# Altium PCB hall_strip.PcbDoc (part 1 of 2)
Units mm, origin at the board's own origin, x right, y up, seen from the top; angles counter-clockwise.
Board outline 200 x 15 mm, 2 copper layers (Top Layer, Bottom Layer); 100 components, 6 nets, 261 pads, 183 vias.
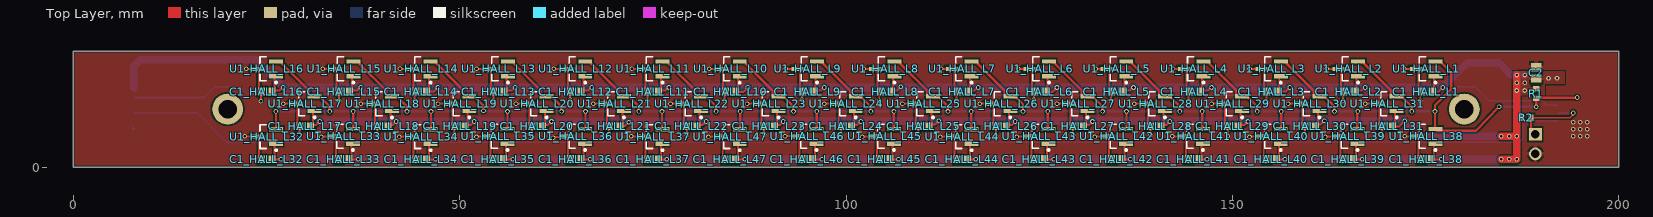
[diagram p0: Top Layer view]
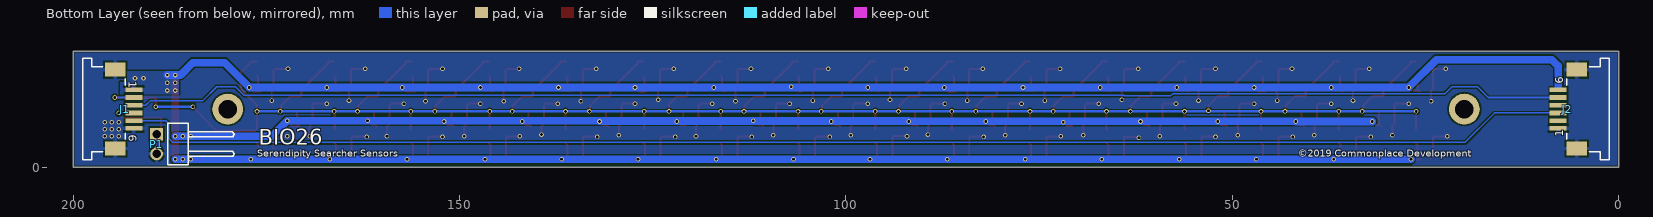
[diagram p1: Bottom Layer view, seen from below]
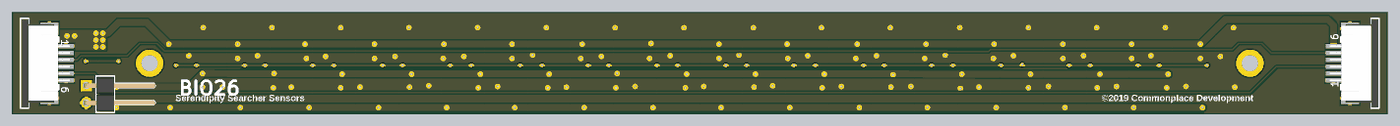
[diagram p3: 3D render of the assembled board from below, using the file's embedded part models]

## Layer stack, top to bottom
Top Solder: solder mask 0.0102, Solder Resist, Dk 3.5
Top Layer: signal copper 0.0356
Dielectric 1: dielectric 0.32, FR-4, Dk 4.8
Bottom Layer: signal copper 0.0356
Bottom Solder: solder mask 0.0102, Solder Resist, Dk 3.5

## Board outline
200,0 200,15 0,15 0,0

## Design rules (kind name [scope] priority, off if disabled: settings)
BoardOutlineClearance [All] p1: gap=0.2 ignorepadtopadclearanceinfootprint=FALSE except(0.4: Arc-SplitBarrior Arc-SplitContinuation Track-SplitBarrior Track-SplitContinuation SMDPad-SplitBarrior SMDPad-SplitContinuation THPad-SplitBarrior THPad-SplitContinuation Via-SplitBarrior Via-SplitContinuation Fill-SplitBarrior Fill-SplitContinuation Poly-SplitBarrior Poly-SplitContinuation Region-SplitBarrior Region-SplitContinuation Text-SplitBarrior Text-SplitContinuation)
Clearance "Clearance Bottom Layer" [OnLayer('Bottom Layer')] p1: gap=0.203 ignorepadtopadclearanceinfootprint=TRUE except(0.254: Arc-Text Track-Text SMDPad-Text THPad-Text Via-Text Fill-Text Poly-Text Region-Text Text-Text)
Clearance "Clearance Top Layer" [OnLayer('Top Layer')] p2: gap=0.203 ignorepadtopadclearanceinfootprint=TRUE except(0.254: Arc-Text Track-Text SMDPad-Text THPad-Text Via-Text Fill-Text Poly-Text Region-Text Text-Text)
Clearance [All] p3: gap=0.2 ignorepadtopadclearanceinfootprint=FALSE except(0.089: Arc-Arc Arc-Track Arc-SMDPad Track-Track Track-SMDPad SMDPad-SMDPad; 0.127: Arc-Via Track-Via SMDPad-Via THPad-Via Via-Via; 0.254: Arc-Text Track-Text SMDPad-Text THPad-Text Via-Text Fill-Text Poly-Text Region-Text Text-Text)
HoleSize [All] p1: absolutevalues=TRUE maxlimit=6.3 minlimit=0.2 maxpercent=80.000 minpercent=20.000
MinimumAnnularRing [All] p1: minimumring=0.076
MinimumSolderMaskSliver [All] p1: minsoldermaskwidth=0.1
PolygonConnect PolygonConnect_1 [All] p1: thpad.connectstyle=Relief thpad.reliefconductorwidth=0.508 thpad.reliefentries=4 thpad.polygonreliefangle="90 Angle" thpad.airgapwidth=0.254 smdpad.connectstyle=Relief smdpad.reliefconductorwidth=0.508 smdpad.reliefentries=4 smdpad.polygonreliefangle="90 Angle" smdpad.airgapwidth=0.254 via.connectstyle=Direct via.reliefconductorwidth=0.508 via.reliefentries=4 via.polygonreliefangle="90 Angle" via.airgapwidth=0.254
PolygonConnect [All] p2: connectstyle=Relief reliefconductorwidth=0.254 reliefentries=4 polygonreliefangle="90 Angle" airgapwidth=0.254
RoomDefinition HALL_L47 [InComponentClass('HALL_L47')] p1: confinementstyle=ConfineIn formatcopy=TRUE lockcomponents=FALSE outline 86.689,0 83.431,0 83.431,1.621 82.181,1.621 82.181,6.279 87.939,6.279 87.939,1.621 86.689,1.621
RoomDefinition HALL_L46 [InComponentClass('HALL_L46')] p2: confinementstyle=ConfineIn formatcopy=TRUE lockcomponents=FALSE outline 96.633,0.029 93.375,0.029 93.375,1.65 92.125,1.65 92.125,6.308 97.883,6.308 97.883,1.65 96.633,1.65
RoomDefinition HALL_L45 [InComponentClass('HALL_L45')] p3: confinementstyle=ConfineIn formatcopy=TRUE lockcomponents=FALSE outline 106.633,0.029 103.375,0.029 103.375,1.65 102.125,1.65 102.125,6.308 107.883,6.308 107.883,1.65 106.633,1.65
RoomDefinition HALL_L44 [InComponentClass('HALL_L44')] p4: confinementstyle=ConfineIn formatcopy=TRUE lockcomponents=FALSE outline 116.689,0 113.431,0 113.431,1.621 112.181,1.621 112.181,6.279 117.939,6.279 117.939,1.621 116.689,1.621
RoomDefinition HALL_L43 [InComponentClass('HALL_L43')] p5: confinementstyle=ConfineIn formatcopy=TRUE lockcomponents=FALSE outline 126.633,0.029 123.375,0.029 123.375,1.65 122.125,1.65 122.125,6.308 127.883,6.308 127.883,1.65 126.633,1.65
RoomDefinition HALL_L42 [InComponentClass('HALL_L42')] p6: confinementstyle=ConfineIn formatcopy=TRUE lockcomponents=FALSE outline 136.689,0.029 133.431,0.029 133.431,1.65 132.181,1.65 132.181,6.308 137.939,6.308 137.939,1.65 136.689,1.65
RoomDefinition HALL_L41 [InComponentClass('HALL_L41')] p7: confinementstyle=ConfineIn formatcopy=TRUE lockcomponents=FALSE outline 146.608,0.029 143.35,0.029 143.35,1.65 142.1,1.65 142.1,6.308 147.858,6.308 147.858,1.65 146.608,1.65
RoomDefinition HALL_L40 [InComponentClass('HALL_L40')] p8: confinementstyle=ConfineIn formatcopy=TRUE lockcomponents=FALSE outline 156.689,0.029 153.431,0.029 153.431,1.65 152.181,1.65 152.181,6.308 157.939,6.308 157.939,1.65 156.689,1.65
RoomDefinition HALL_L39 [InComponentClass('HALL_L39')] p9: confinementstyle=ConfineIn formatcopy=TRUE lockcomponents=FALSE outline 166.608,0.029 163.35,0.029 163.35,1.65 162.1,1.65 162.1,6.308 167.858,6.308 167.858,1.65 166.608,1.65
RoomDefinition HALL_L38 [InComponentClass('HALL_L38')] p10: confinementstyle=ConfineIn formatcopy=TRUE lockcomponents=FALSE outline 176.689,0.029 173.431,0.029 173.431,1.65 172.181,1.65 172.181,6.308 177.939,6.308 177.939,1.65 176.689,1.65
RoomDefinition HALL_L37 [InComponentClass('HALL_L37')] p11: confinementstyle=ConfineIn formatcopy=TRUE lockcomponents=FALSE outline 76.689,0 73.431,0 73.431,1.621 72.181,1.621 72.181,6.279 77.939,6.279 77.939,1.621 76.689,1.621
RoomDefinition HALL_L36 [InComponentClass('HALL_L36')] p12: confinementstyle=ConfineIn formatcopy=TRUE lockcomponents=FALSE outline 66.689,0.029 63.431,0.029 63.431,1.65 62.181,1.65 62.181,6.308 67.939,6.308 67.939,1.65 66.689,1.65
RoomDefinition HALL_L35 [InComponentClass('HALL_L35')] p13: confinementstyle=ConfineIn formatcopy=TRUE lockcomponents=FALSE outline 56.633,0.029 53.375,0.029 53.375,1.65 52.125,1.65 52.125,6.308 57.883,6.308 57.883,1.65 56.633,1.65
RoomDefinition HALL_L34 [InComponentClass('HALL_L34')] p14: confinementstyle=ConfineIn formatcopy=TRUE lockcomponents=FALSE outline 46.689,0 43.431,0 43.431,1.621 42.181,1.621 42.181,6.279 47.939,6.279 47.939,1.621 46.689,1.621
RoomDefinition HALL_L33 [InComponentClass('HALL_L33')] p15: confinementstyle=ConfineIn formatcopy=TRUE lockcomponents=FALSE outline 36.633,0.029 33.375,0.029 33.375,1.65 32.125,1.65 32.125,6.308 37.883,6.308 37.883,1.65 36.633,1.65
RoomDefinition HALL_L32 [InComponentClass('HALL_L32')] p16: confinementstyle=ConfineIn formatcopy=TRUE lockcomponents=FALSE outline 26.697,0 23.439,0 23.439,1.621 22.189,1.621 22.189,6.279 27.947,6.279 27.947,1.621 26.697,1.621
RoomDefinition HALL_L31 [InComponentClass('HALL_L31')] p17: confinementstyle=ConfineIn formatcopy=TRUE lockcomponents=FALSE outline 171.689,4.25 168.431,4.25 168.431,5.871 167.181,5.871 167.181,10.529 172.939,10.529 172.939,5.871 171.689,5.871
RoomDefinition HALL_L30 [InComponentClass('HALL_L30')] p18: confinementstyle=ConfineIn formatcopy=TRUE lockcomponents=FALSE outline 161.689,4.25 158.431,4.25 158.431,5.871 157.181,5.871 157.181,10.529 162.939,10.529 162.939,5.871 161.689,5.871
RoomDefinition HALL_L29 [InComponentClass('HALL_L29')] p19: confinementstyle=ConfineIn formatcopy=TRUE lockcomponents=FALSE outline 151.697,4.25 148.439,4.25 148.439,5.871 147.189,5.871 147.189,10.529 152.947,10.529 152.947,5.871 151.697,5.871
RoomDefinition HALL_L28 [InComponentClass('HALL_L28')] p20: confinementstyle=ConfineIn formatcopy=TRUE lockcomponents=FALSE outline 141.697,4.25 138.439,4.25 138.439,5.871 137.189,5.871 137.189,10.529 142.947,10.529 142.947,5.871 141.697,5.871
RoomDefinition HALL_L27 [InComponentClass('HALL_L27')] p21: confinementstyle=ConfineIn formatcopy=TRUE lockcomponents=FALSE outline 131.697,4.25 128.439,4.25 128.439,5.871 127.189,5.871 127.189,10.529 132.947,10.529 132.947,5.871 131.697,5.871
RoomDefinition HALL_L26 [InComponentClass('HALL_L26')] p22: confinementstyle=ConfineIn formatcopy=TRUE lockcomponents=FALSE outline 121.697,4.25 118.439,4.25 118.439,5.871 117.189,5.871 117.189,10.529 122.947,10.529 122.947,5.871 121.697,5.871
RoomDefinition HALL_L25 [InComponentClass('HALL_L25')] p23: confinementstyle=ConfineIn formatcopy=TRUE lockcomponents=FALSE outline 111.697,4.25 108.439,4.25 108.439,5.871 107.189,5.871 107.189,10.529 112.947,10.529 112.947,5.871 111.697,5.871
RoomDefinition HALL_L24 [InComponentClass('HALL_L24')] p24: confinementstyle=ConfineIn formatcopy=TRUE lockcomponents=FALSE outline 101.697,4.25 98.439,4.25 98.439,5.871 97.189,5.871 97.189,10.529 102.947,10.529 102.947,5.871 101.697,5.871
RoomDefinition HALL_L23 [InComponentClass('HALL_L23')] p25: confinementstyle=ConfineIn formatcopy=TRUE lockcomponents=FALSE outline 91.697,4.25 88.439,4.25 88.439,5.871 87.189,5.871 87.189,10.529 92.947,10.529 92.947,5.871 91.697,5.871
RoomDefinition HALL_L22 [InComponentClass('HALL_L22')] p26: confinementstyle=ConfineIn formatcopy=TRUE lockcomponents=FALSE outline 81.697,4.25 78.439,4.25 78.439,5.871 77.189,5.871 77.189,10.529 82.947,10.529 82.947,5.871 81.697,5.871
RoomDefinition HALL_L21 [InComponentClass('HALL_L21')] p27: confinementstyle=ConfineIn formatcopy=TRUE lockcomponents=FALSE outline 71.697,4.25 68.439,4.25 68.439,5.871 67.189,5.871 67.189,10.529 72.947,10.529 72.947,5.871 71.697,5.871
RoomDefinition HALL_L20 [InComponentClass('HALL_L20')] p28: confinementstyle=ConfineIn formatcopy=TRUE lockcomponents=FALSE outline 61.697,4.25 58.439,4.25 58.439,5.871 57.189,5.871 57.189,10.529 62.947,10.529 62.947,5.871 61.697,5.871
RoomDefinition HALL_L19 [InComponentClass('HALL_L19')] p29: confinementstyle=ConfineIn formatcopy=TRUE lockcomponents=FALSE outline 51.697,4.25 48.439,4.25 48.439,5.871 47.189,5.871 47.189,10.529 52.947,10.529 52.947,5.871 51.697,5.871
RoomDefinition HALL_L18 [InComponentClass('HALL_L18')] p30: confinementstyle=ConfineIn formatcopy=TRUE lockcomponents=FALSE outline 41.697,4.25 38.439,4.25 38.439,5.871 37.189,5.871 37.189,10.529 42.947,10.529 42.947,5.871 41.697,5.871
RoomDefinition HALL_L17 [InComponentClass('HALL_L17')] p31: confinementstyle=ConfineIn formatcopy=TRUE lockcomponents=FALSE outline 31.689,4.25 28.431,4.25 28.431,5.871 27.181,5.871 27.181,10.529 32.939,10.529 32.939,5.871 31.689,5.871
RoomDefinition U_input [InComponentClass('U_input')] p32: confinementstyle=ConfineIn formatcopy=TRUE lockcomponents=FALSE outline 0.746,0.446 0.746,14.554 9.429,14.554 9.429,0.446
RoomDefinition U_gpio [InComponentClass('U_gpio')] p33: confinementstyle=ConfineIn formatcopy=TRUE lockcomponents=FALSE outline 178.681,-0.199 178.681,6.139 186.621,6.139 186.621,7.279 189.379,7.279 189.379,6.139 190.504,6.139 190.504,-0.199
RoomDefinition U_output [InComponentClass('U_output')] p34: confinementstyle=ConfineIn formatcopy=TRUE lockcomponents=FALSE outline 188.171,10.571 188.171,13.829 190.571,13.829 190.571,14.554 199.254,14.554 199.254,0.446 190.571,0.446 190.571,8.121 188.421,8.121 188.421,10.571
RoomDefinition HALL_L16 [InComponentClass('HALL_L16')] p35: confinementstyle=ConfineIn formatcopy=TRUE lockcomponents=FALSE outline 26.697,8.75 23.439,8.75 23.439,10.371 22.189,10.371 22.189,15.029 27.947,15.029 27.947,10.371 26.697,10.371
RoomDefinition HALL_L15 [InComponentClass('HALL_L15')] p36: confinementstyle=ConfineIn formatcopy=TRUE lockcomponents=FALSE outline 36.697,8.75 33.439,8.75 33.439,10.371 32.189,10.371 32.189,15.029 37.947,15.029 37.947,10.371 36.697,10.371
RoomDefinition HALL_L14 [InComponentClass('HALL_L14')] p37: confinementstyle=ConfineIn formatcopy=TRUE lockcomponents=FALSE outline 46.697,8.75 43.439,8.75 43.439,10.371 42.189,10.371 42.189,15.029 47.947,15.029 47.947,10.371 46.697,10.371
RoomDefinition HALL_L13 [InComponentClass('HALL_L13')] p38: confinementstyle=ConfineIn formatcopy=TRUE lockcomponents=FALSE outline 56.697,8.75 53.439,8.75 53.439,10.371 52.189,10.371 52.189,15.029 57.947,15.029 57.947,10.371 56.697,10.371
RoomDefinition HALL_L12 [InComponentClass('HALL_L12')] p39: confinementstyle=ConfineIn formatcopy=TRUE lockcomponents=FALSE outline 66.697,8.75 63.439,8.75 63.439,10.371 62.189,10.371 62.189,15.029 67.947,15.029 67.947,10.371 66.697,10.371
RoomDefinition HALL_L11 [InComponentClass('HALL_L11')] p40: confinementstyle=ConfineIn formatcopy=TRUE lockcomponents=FALSE outline 76.697,8.75 73.439,8.75 73.439,10.371 72.189,10.371 72.189,15.029 77.947,15.029 77.947,10.371 76.697,10.371
RoomDefinition HALL_L10 [InComponentClass('HALL_L10')] p41: confinementstyle=ConfineIn formatcopy=TRUE lockcomponents=FALSE outline 86.697,8.75 83.439,8.75 83.439,10.371 82.189,10.371 82.189,15.029 87.947,15.029 87.947,10.371 86.697,10.371
RoomDefinition HALL_L9 [InComponentClass('HALL_L9')] p42: confinementstyle=ConfineIn formatcopy=TRUE lockcomponents=FALSE outline 96.697,8.75 93.439,8.75 93.439,10.371 92.189,10.371 92.189,15.029 97.947,15.029 97.947,10.371 96.697,10.371
RoomDefinition HALL_L8 [InComponentClass('HALL_L8')] p43: confinementstyle=ConfineIn formatcopy=TRUE lockcomponents=FALSE outline 106.697,8.75 103.439,8.75 103.439,10.371 102.189,10.371 102.189,15.029 107.947,15.029 107.947,10.371 106.697,10.371
RoomDefinition HALL_L7 [InComponentClass('HALL_L7')] p44: confinementstyle=ConfineIn formatcopy=TRUE lockcomponents=FALSE outline 116.697,8.75 113.439,8.75 113.439,10.371 112.189,10.371 112.189,15.029 117.947,15.029 117.947,10.371 116.697,10.371
RoomDefinition HALL_L6 [InComponentClass('HALL_L6')] p45: confinementstyle=ConfineIn formatcopy=TRUE lockcomponents=FALSE outline 126.697,8.75 123.439,8.75 123.439,10.371 122.189,10.371 122.189,15.029 127.947,15.029 127.947,10.371 126.697,10.371
RoomDefinition HALL_L5 [InComponentClass('HALL_L5')] p46: confinementstyle=ConfineIn formatcopy=TRUE lockcomponents=FALSE outline 136.697,8.75 133.439,8.75 133.439,10.371 132.189,10.371 132.189,15.029 137.947,15.029 137.947,10.371 136.697,10.371
RoomDefinition HALL_L4 [InComponentClass('HALL_L4')] p47: confinementstyle=ConfineIn formatcopy=TRUE lockcomponents=FALSE outline 146.697,8.75 143.439,8.75 143.439,10.371 142.189,10.371 142.189,15.029 147.947,15.029 147.947,10.371 146.697,10.371
RoomDefinition HALL_L3 [InComponentClass('HALL_L3')] p48: confinementstyle=ConfineIn formatcopy=TRUE lockcomponents=FALSE outline 156.697,8.75 153.439,8.75 153.439,10.371 152.189,10.371 152.189,15.029 157.947,15.029 157.947,10.371 156.697,10.371
RoomDefinition HALL_L2 [InComponentClass('HALL_L2')] p49: confinementstyle=ConfineIn formatcopy=TRUE lockcomponents=FALSE outline 166.697,8.75 163.439,8.75 163.439,10.371 162.189,10.371 162.189,15.029 167.947,15.029 167.947,10.371 166.697,10.371
RoomDefinition HALL_L1 [InComponentClass('HALL_L1')] p50: confinementstyle=ConfineIn formatcopy=TRUE lockcomponents=FALSE outline 176.697,8.75 173.439,8.75 173.439,10.371 172.189,10.371 172.189,15.029 177.947,15.029 177.947,10.371 176.697,10.371
RoutingCorners [All] p1: cornerstyle=Round minsetback=2.54 maxsetback=2.54
RoutingVias [All] p1: holewidth=0.5 width=1 viastyle="Through Hole" minholewidth=0.2 minwidth=0.45 maxholewidth=1 maxwidth=2
SilkToSilkClearance [All] p1: silktosilkclearance=0.1
SilkToSolderMaskClearance [IsPad] p1: minsilkscreentomaskgap=0.1 clearancetoexposedcopper=TRUE
SolderMaskExpansion [All] p1: expansion=0.102
Width [All] p1: maxlimit=2.54 minlimit=0.089 preferedwidth=0.381
25 further rules are at their usual default settings.

## Classes and differential pairs
net class HALL[1..47]: HALL47
component class HALL_L47: C1_HALL_L47 U1_HALL_L47
component class HALL_L46: C1_HALL_L46 U1_HALL_L46
component class HALL_L45: C1_HALL_L45 U1_HALL_L45
component class HALL_L44: C1_HALL_L44 U1_HALL_L44
component class HALL_L43: C1_HALL_L43 U1_HALL_L43
component class HALL_L42: C1_HALL_L42 U1_HALL_L42
component class HALL_L41: C1_HALL_L41 U1_HALL_L41
component class HALL_L40: C1_HALL_L40 U1_HALL_L40
component class HALL_L39: C1_HALL_L39 U1_HALL_L39
component class HALL_L38: C1_HALL_L38 U1_HALL_L38
component class HALL_L37: C1_HALL_L37 U1_HALL_L37
component class HALL_L36: C1_HALL_L36 U1_HALL_L36
component class HALL_L35: C1_HALL_L35 U1_HALL_L35
component class HALL_L34: C1_HALL_L34 U1_HALL_L34
component class HALL_L33: C1_HALL_L33 U1_HALL_L33
component class HALL_L32: C1_HALL_L32 U1_HALL_L32
component class HALL_L31: C1_HALL_L31 U1_HALL_L31
component class HALL_L30: C1_HALL_L30 U1_HALL_L30
component class HALL_L29: C1_HALL_L29 U1_HALL_L29
component class HALL_L28: C1_HALL_L28 U1_HALL_L28
component class HALL_L27: C1_HALL_L27 U1_HALL_L27
component class HALL_L26: C1_HALL_L26 U1_HALL_L26
component class HALL_L25: C1_HALL_L25 U1_HALL_L25
component class HALL_L24: C1_HALL_L24 U1_HALL_L24
component class HALL_L23: C1_HALL_L23 U1_HALL_L23
component class HALL_L22: C1_HALL_L22 U1_HALL_L22
component class HALL_L21: C1_HALL_L21 U1_HALL_L21
component class HALL_L20: C1_HALL_L20 U1_HALL_L20
component class HALL_L19: C1_HALL_L19 U1_HALL_L19
component class HALL_L18: C1_HALL_L18 U1_HALL_L18
component class HALL_L17: C1_HALL_L17 U1_HALL_L17
component class U_input: J2
component class U_gpio: P1 R2
channel class hall_sensor: HALL_L1 HALL_L2 HALL_L3 HALL_L4 HALL_L5 HALL_L6 HALL_L7 HALL_L8 HALL_L9 HALL_L10 HALL_L11 HALL_L12 HALL_L13 HALL_L14 HALL_L15 HALL_L16 HALL_L17 HALL_L18 HALL_L19 HALL_L20 HALL_L21 HALL_L22 HALL_L23 HALL_L24 HALL_L25 HALL_L26 HALL_L27 HALL_L28 HALL_L29 HALL_L30 HALL_L31 HALL_L32 HALL_L33 HALL_L34 HALL_L35 HALL_L36 HALL_L37 HALL_L38 HALL_L39 HALL_L40 HALL_L41 HALL_L42 HALL_L43 HALL_L44 HALL_L45 HALL_L46 HALL_L47
component class U_output: C2 J1 R1
component class HALL_L16: C1_HALL_L16 U1_HALL_L16
component class HALL_L15: C1_HALL_L15 U1_HALL_L15
component class HALL_L14: C1_HALL_L14 U1_HALL_L14
component class HALL_L13: C1_HALL_L13 U1_HALL_L13
component class HALL_L12: C1_HALL_L12 U1_HALL_L12
component class HALL_L11: C1_HALL_L11 U1_HALL_L11
component class HALL_L10: C1_HALL_L10 U1_HALL_L10
component class HALL_L9: C1_HALL_L9 U1_HALL_L9
component class HALL_L8: C1_HALL_L8 U1_HALL_L8
component class HALL_L7: C1_HALL_L7 U1_HALL_L7
component class HALL_L6: C1_HALL_L6 U1_HALL_L6
component class HALL_L5: C1_HALL_L5 U1_HALL_L5
component class HALL_L4: C1_HALL_L4 U1_HALL_L4
component class HALL_L3: C1_HALL_L3 U1_HALL_L3
component class HALL_L2: C1_HALL_L2 U1_HALL_L2
component class HALL_L1: C1_HALL_L1 U1_HALL_L1

## Components (designator, comment, footprint, x,y, rotation, side; value= is the part's Value field where it differs from the comment)
C1_HALL_L1 "0.1uF" CAPC1608X87X35NL15T15 175.058,9.762 r180 top (schematic designator C1)
C1_HALL_L2 "0.1uF" CAPC1608X87X35NL15T15 165.058,9.762 r180 top (schematic designator C1)
C1_HALL_L3 "0.1uF" CAPC1608X87X35NL15T15 155.058,9.762 r180 top (schematic designator C1)
C1_HALL_L4 "0.1uF" CAPC1608X87X35NL15T15 145.058,9.762 r180 top (schematic designator C1)
C1_HALL_L5 "0.1uF" CAPC1608X87X35NL15T15 135.058,9.762 r180 top (schematic designator C1)
C1_HALL_L6 "0.1uF" CAPC1608X87X35NL15T15 125.058,9.762 r180 top (schematic designator C1)
C1_HALL_L7 "0.1uF" CAPC1608X87X35NL15T15 115.058,9.762 r180 top (schematic designator C1)
C1_HALL_L8 "0.1uF" CAPC1608X87X35NL15T15 105.058,9.762 r180 top (schematic designator C1)
C1_HALL_L9 "0.1uF" CAPC1608X87X35NL15T15 95.058,9.762 r180 top (schematic designator C1)
C1_HALL_L10 "0.1uF" CAPC1608X87X35NL15T15 85.058,9.762 r180 top (schematic designator C1)
C1_HALL_L11 "0.1uF" CAPC1608X87X35NL15T15 75.058,9.762 r180 top (schematic designator C1)
C1_HALL_L12 "0.1uF" CAPC1608X87X35NL15T15 65.058,9.762 r180 top (schematic designator C1)
C1_HALL_L13 "0.1uF" CAPC1608X87X35NL15T15 55.058,9.762 r180 top (schematic designator C1)
C1_HALL_L14 "0.1uF" CAPC1608X87X35NL15T15 45.058,9.762 r180 top (schematic designator C1)
C1_HALL_L15 "0.1uF" CAPC1608X87X35NL15T15 35.058,9.762 r180 top (schematic designator C1)
C1_HALL_L16 "0.1uF" CAPC1608X87X35NL15T15 25.058,9.762 r180 top (schematic designator C1)
C1_HALL_L17 "0.1uF" CAPC1608X87X35NL15T15 30.05,5.262 r180 top (schematic designator C1)
C1_HALL_L18 "0.1uF" CAPC1608X87X35NL15T15 40.058,5.262 r180 top (schematic designator C1)
C1_HALL_L19 "0.1uF" CAPC1608X87X35NL15T15 50.058,5.262 r180 top (schematic designator C1)
C1_HALL_L20 "0.1uF" CAPC1608X87X35NL15T15 60.058,5.262 r180 top (schematic designator C1)
C1_HALL_L21 "0.1uF" CAPC1608X87X35NL15T15 70.058,5.262 r180 top (schematic designator C1)
C1_HALL_L22 "0.1uF" CAPC1608X87X35NL15T15 80.058,5.262 r180 top (schematic designator C1)
C1_HALL_L23 "0.1uF" CAPC1608X87X35NL15T15 90.058,5.262 r180 top (schematic designator C1)
C1_HALL_L24 "0.1uF" CAPC1608X87X35NL15T15 100.058,5.262 r180 top (schematic designator C1)
C1_HALL_L25 "0.1uF" CAPC1608X87X35NL15T15 110.058,5.262 r180 top (schematic designator C1)
C1_HALL_L26 "0.1uF" CAPC1608X87X35NL15T15 120.058,5.262 r180 top (schematic designator C1)
C1_HALL_L27 "0.1uF" CAPC1608X87X35NL15T15 130.058,5.262 r180 top (schematic designator C1)
C1_HALL_L28 "0.1uF" CAPC1608X87X35NL15T15 140.058,5.262 r180 top (schematic designator C1)
C1_HALL_L29 "0.1uF" CAPC1608X87X35NL15T15 150.058,5.262 r180 top (schematic designator C1)
C1_HALL_L30 "0.1uF" CAPC1608X87X35NL15T15 160.05,5.262 r180 top (schematic designator C1)
C1_HALL_L31 "0.1uF" CAPC1608X87X35NL15T15 170.05,5.262 r180 top (schematic designator C1)
C1_HALL_L32 "0.1uF" CAPC1608X87X35NL15T15 25.058,1.012 r180 top (schematic designator C1)
C1_HALL_L33 "0.1uF" CAPC1608X87X35NL15T15 34.994,1.041 r180 top (schematic designator C1)
C1_HALL_L34 "0.1uF" CAPC1608X87X35NL15T15 45.05,1.012 r180 top (schematic designator C1)
C1_HALL_L35 "0.1uF" CAPC1608X87X35NL15T15 54.994,1.041 r180 top (schematic designator C1)
C1_HALL_L36 "0.1uF" CAPC1608X87X35NL15T15 65.05,1.041 r180 top (schematic designator C1)
C1_HALL_L37 "0.1uF" CAPC1608X87X35NL15T15 75.05,1.012 r180 top (schematic designator C1)
C1_HALL_L38 "0.1uF" CAPC1608X87X35NL15T15 175.05,1.041 r180 top (schematic designator C1)
C1_HALL_L39 "0.1uF" CAPC1608X87X35NL15T15 164.969,1.041 r180 top (schematic designator C1)
C1_HALL_L40 "0.1uF" CAPC1608X87X35NL15T15 155.05,1.041 r180 top (schematic designator C1)
C1_HALL_L41 "0.1uF" CAPC1608X87X35NL15T15 144.969,1.041 r180 top (schematic designator C1)
C1_HALL_L42 "0.1uF" CAPC1608X87X35NL15T15 135.05,1.041 r180 top (schematic designator C1)
C1_HALL_L43 "0.1uF" CAPC1608X87X35NL15T15 124.994,1.041 r180 top (schematic designator C1)
C1_HALL_L44 "0.1uF" CAPC1608X87X35NL15T15 115.05,1.012 r180 top (schematic designator C1)
C1_HALL_L45 "0.1uF" CAPC1608X87X35NL15T15 104.994,1.041 r180 top (schematic designator C1)
C1_HALL_L46 "0.1uF" CAPC1608X87X35NL15T15 94.994,1.041 r180 top (schematic designator C1)
C1_HALL_L47 "0.1uF" CAPC1608X87X35NL15T15 85.05,1.012 r180 top (schematic designator C1)
C2 "10uF" CAPC2013X140X50LL20T25 189.3,12.2 r270 top
J1 "68610614422" 68610614422 196,7.5 r270 bottom locked
J2 "68610614422" 68610614422 4,7.5 r90 bottom locked
P1 "61300211021" 61300211021 186.43,2.97 r90 bottom
R1 "10K" RESC1608X55X30LL15T15 189.3,9.5 r90 top
R2 "10K" RESC1608X55X30LL15T15 188,6.4 r180 top
U1_HALL_L1 "AH1802 / TLE4913" INF-PG-SC59_M 175.058,12.7 r180 top (schematic designator U1)
U1_HALL_L2 "AH1802 / TLE4913" INF-PG-SC59_M 165.058,12.7 r180 top (schematic designator U1)
U1_HALL_L3 "AH1802 / TLE4913" INF-PG-SC59_M 155.058,12.7 r180 top (schematic designator U1)
U1_HALL_L4 "AH1802 / TLE4913" INF-PG-SC59_M 145.058,12.7 r180 top (schematic designator U1)
U1_HALL_L5 "AH1802 / TLE4913" INF-PG-SC59_M 135.058,12.7 r180 top (schematic designator U1)
U1_HALL_L6 "AH1802 / TLE4913" INF-PG-SC59_M 125.058,12.7 r180 top (schematic designator U1)
U1_HALL_L7 "AH1802 / TLE4913" INF-PG-SC59_M 115.058,12.7 r180 top (schematic designator U1)
U1_HALL_L8 "AH1802 / TLE4913" INF-PG-SC59_M 105.058,12.7 r180 top (schematic designator U1)
U1_HALL_L9 "AH1802 / TLE4913" INF-PG-SC59_M 95.058,12.7 r180 top (schematic designator U1)
U1_HALL_L10 "AH1802 / TLE4913" INF-PG-SC59_M 85.058,12.7 r180 top (schematic designator U1)
U1_HALL_L11 "AH1802 / TLE4913" INF-PG-SC59_M 75.058,12.7 r180 top (schematic designator U1)
U1_HALL_L12 "AH1802 / TLE4913" INF-PG-SC59_M 65.058,12.7 r180 top (schematic designator U1)
U1_HALL_L13 "AH1802 / TLE4913" INF-PG-SC59_M 55.058,12.7 r180 top (schematic designator U1)
U1_HALL_L14 "AH1802 / TLE4913" INF-PG-SC59_M 45.058,12.7 r180 top (schematic designator U1)
U1_HALL_L15 "AH1802 / TLE4913" INF-PG-SC59_M 35.058,12.7 r180 top (schematic designator U1)
U1_HALL_L16 "AH1802 / TLE4913" INF-PG-SC59_M 25.058,12.7 r180 top (schematic designator U1)
U1_HALL_L17 "AH1802 / TLE4913" INF-PG-SC59_M 30.05,8.2 r180 top (schematic designator U1)
U1_HALL_L18 "AH1802 / TLE4913" INF-PG-SC59_M 40.058,8.2 r180 top (schematic designator U1)
U1_HALL_L19 "AH1802 / TLE4913" INF-PG-SC59_M 50.058,8.2 r180 top (schematic designator U1)
U1_HALL_L20 "AH1802 / TLE4913" INF-PG-SC59_M 60.058,8.2 r180 top (schematic designator U1)
U1_HALL_L21 "AH1802 / TLE4913" INF-PG-SC59_M 70.058,8.2 r180 top (schematic designator U1)
U1_HALL_L22 "AH1802 / TLE4913" INF-PG-SC59_M 80.058,8.2 r180 top (schematic designator U1)
U1_HALL_L23 "AH1802 / TLE4913" INF-PG-SC59_M 90.058,8.2 r180 top (schematic designator U1)
U1_HALL_L24 "AH1802 / TLE4913" INF-PG-SC59_M 100.058,8.2 r180 top (schematic designator U1)
U1_HALL_L25 "AH1802 / TLE4913" INF-PG-SC59_M 110.058,8.2 r180 top (schematic designator U1)
U1_HALL_L26 "AH1802 / TLE4913" INF-PG-SC59_M 120.058,8.2 r180 top (schematic designator U1)
U1_HALL_L27 "AH1802 / TLE4913" INF-PG-SC59_M 130.058,8.2 r180 top (schematic designator U1)
U1_HALL_L28 "AH1802 / TLE4913" INF-PG-SC59_M 140.058,8.2 r180 top (schematic designator U1)
U1_HALL_L29 "AH1802 / TLE4913" INF-PG-SC59_M 150.058,8.2 r180 top (schematic designator U1)
U1_HALL_L30 "AH1802 / TLE4913" INF-PG-SC59_M 160.05,8.2 r180 top (schematic designator U1)
U1_HALL_L31 "AH1802 / TLE4913" INF-PG-SC59_M 170.05,8.2 r180 top (schematic designator U1)
U1_HALL_L32 "AH1802 / TLE4913" INF-PG-SC59_M 25.058,3.95 r180 top (schematic designator U1)
U1_HALL_L33 "AH1802 / TLE4913" INF-PG-SC59_M 34.994,3.979 r180 top (schematic designator U1)
U1_HALL_L34 "AH1802 / TLE4913" INF-PG-SC59_M 45.05,3.95 r180 top (schematic designator U1)
U1_HALL_L35 "AH1802 / TLE4913" INF-PG-SC59_M 54.994,3.979 r180 top (schematic designator U1)
U1_HALL_L36 "AH1802 / TLE4913" INF-PG-SC59_M 65.05,3.979 r180 top (schematic designator U1)
U1_HALL_L37 "AH1802 / TLE4913" INF-PG-SC59_M 75.05,3.95 r180 top (schematic designator U1)
U1_HALL_L38 "AH1802 / TLE4913" INF-PG-SC59_M 175.05,3.979 r180 top (schematic designator U1)
U1_HALL_L39 "AH1802 / TLE4913" INF-PG-SC59_M 164.969,3.979 r180 top (schematic designator U1)
U1_HALL_L40 "AH1802 / TLE4913" INF-PG-SC59_M 155.05,3.979 r180 top (schematic designator U1)
U1_HALL_L41 "AH1802 / TLE4913" INF-PG-SC59_M 144.969,3.979 r180 top (schematic designator U1)
U1_HALL_L42 "AH1802 / TLE4913" INF-PG-SC59_M 135.05,3.979 r180 top (schematic designator U1)
U1_HALL_L43 "AH1802 / TLE4913" INF-PG-SC59_M 124.994,3.979 r180 top (schematic designator U1)
U1_HALL_L44 "AH1802 / TLE4913" INF-PG-SC59_M 115.05,3.95 r180 top (schematic designator U1)
U1_HALL_L45 "AH1802 / TLE4913" INF-PG-SC59_M 104.994,3.979 r180 top (schematic designator U1)
U1_HALL_L46 "AH1802 / TLE4913" INF-PG-SC59_M 94.994,3.979 r180 top (schematic designator U1)
U1_HALL_L47 "AH1802 / TLE4913" INF-PG-SC59_M 85.05,3.95 r180 top (schematic designator U1)

## Footprints (in the part's own frame and the unit in brackets; to place one, negate y for a bottom-side part, rotate by r counter-clockwise, add the part's x,y. Pads: shape width x height; smd on the part's side, far side on the other; paste and mask are expansions set on the pad)
61300211021 [mm] "Pin Header, pitch 2.54 mm, THT, Angled, single row, 2p"
  rect 1.65x1.65 hole 1.1: 1(1.27,2.77)
  round 1.65 hole 1.1: 2(-1.27,2.77)
  silkscreen extent -2.69,-7.27 2.69,1.35, body extent -2.54,-7.27 2.54,3.09, height 2.58
68610614422 [mm] "ZIF Connectors, Horizontal, Bottom Contact, pitch 1mm, 6p"
  rect 0.6x2.2 smd: 1(-2.5,3.85) 2(-1.5,3.85) 3(-0.5,3.85) 4(0.5,3.85) 5(1.5,3.85) 6(2.5,3.85)
  rect 1.8x2.6 smd: MP1(-5.1,1.45) MP2(5.1,1.45)
  silkscreen extent -6.57,-2.78 6.58,2.78, body extent -6.5,-2.7 6.5,4.4, height 3.02
CAPC1608X87X35NL15T15 [mm] "Chip Capacitor, 2-Leads, Body 1.60x0.80mm, IPC Medium Density"
  rect 0.9x1 smd: 1(-0.675,0) 2(0.675,0)
  body extent -0.87,-0.48 0.87,0.47, height 0.87
CAPC2013X140X50LL20T25 [mm] "Chip Capacitor, 2-Leads, Body 2.00x1.25mm, IPC High Density"
  rect 1.1x1.35 smd: 1(-0.7,0) 2(0.7,0)
  body extent -1.1,-0.72 1.1,0.72, height 1.4
INF-PG-SC59_M [mm] "SOT23, 3-Leads, Body 3x1.53mm, Pitch 0.95mm, IPC Low Density"
  rect 1.8x0.55 smd: 1(-1.2,0.95) 2(-1.2,-0.95) 3(1.2,0)
  silkscreen extent -1.33,-1.55 0.87,1.9, body extent -0.87,-1.55 0.87,1.55, height 1.35
RESC1608X55X30LL15T15 [mm] "Chip Resistor, 2-Leads, Body 1.60x0.80mm, IPC High Density"
  rect 0.7x0.85 smd: 1(-0.625,0) 2(0.625,0)
  body extent -0.87,-0.48 0.87,0.48, height 0.55